# Altium PCB Mach3led.PcbDoc
Units mil, origin at the board's own origin, x right, y up, seen from the top; angles counter-clockwise.
Board outline 1085 x 585 mil, 2 copper layers (Top Layer, Bottom Layer); 7 components, 7 nets, 16 pads, 0 vias.
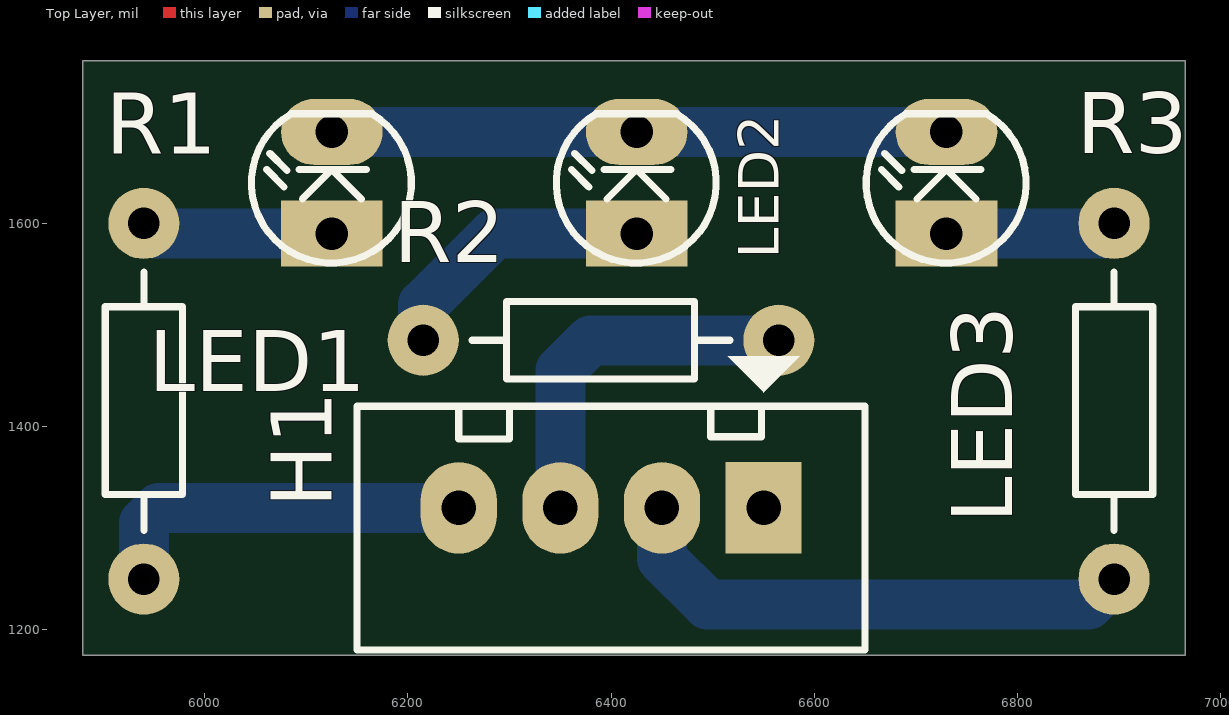
[diagram p0: Top Layer view]
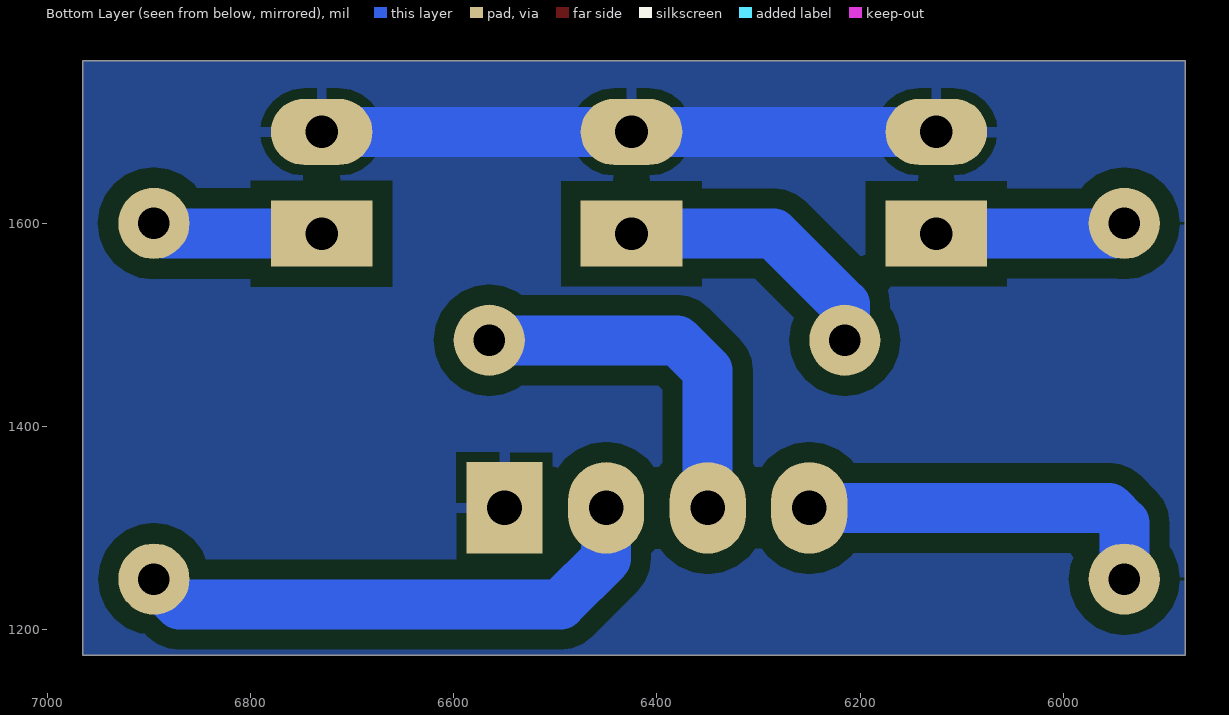
[diagram p1: Bottom Layer view, seen from below]
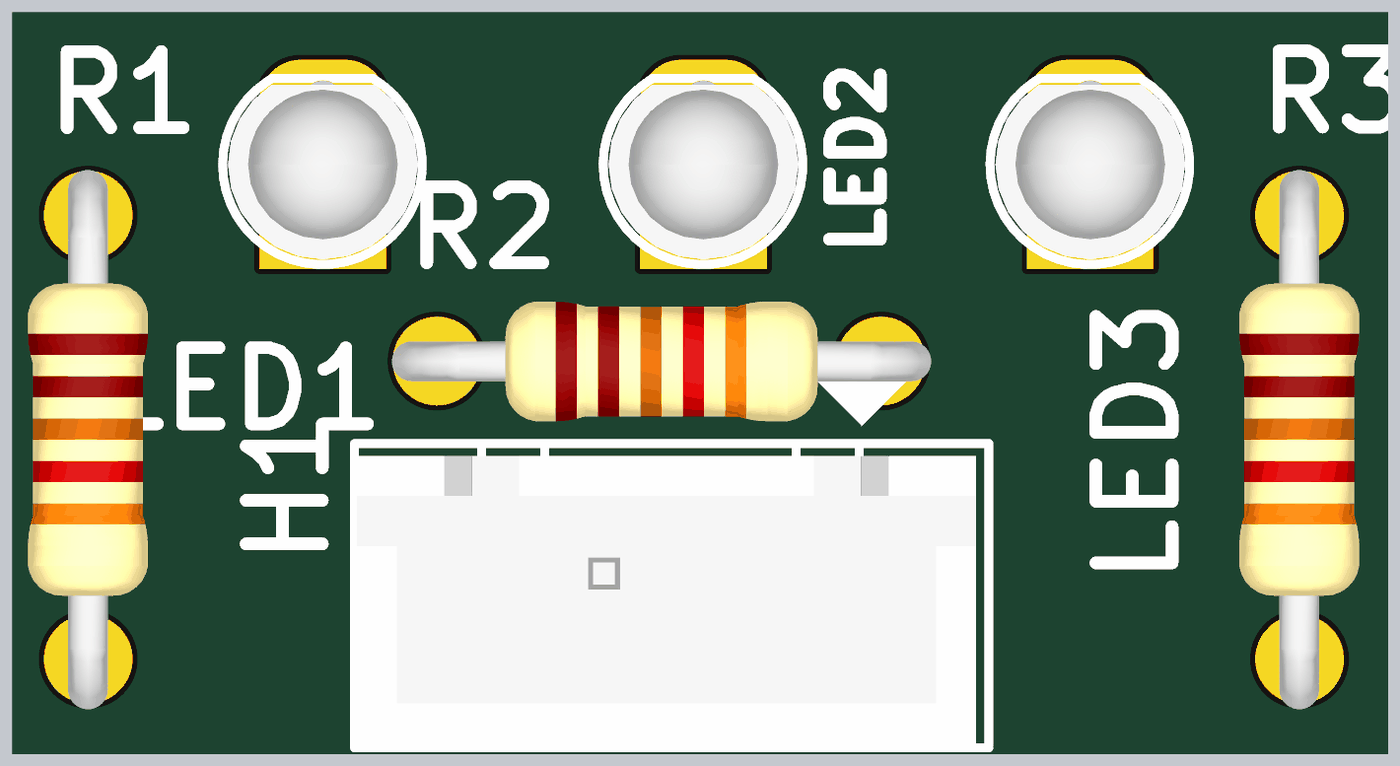
[diagram p2: 3D render of the assembled board from above, using the file's embedded part models]

## Layer stack, top to bottom
Top Solder: solder mask 0.4, Solder Resist, Dk 3.5
Top Layer: signal copper 1.4
Dielectric 1: dielectric 12.6, FR-4, Dk 4.8
Bottom Layer: signal copper 1.4
Bottom Solder: solder mask 0.4, Solder Resist, Dk 3.5

## Board outline
5880,1175 6965,1175 6965,1760 5880,1760

## Design rules (kind name [scope] priority, off if disabled: settings)
Clearance [All] p1: gap=19.68 ignorepadtopadclearanceinfootprint=FALSE
PolygonConnect [All] p1: connectstyle=Relief reliefconductorwidth=10 reliefentries=4 polygonreliefangle="90 Angle" airgapwidth=10
RoomDefinition Mach3led [InComponentClass('Mach3led')] p1: confinementstyle=ConfineIn formatcopy=TRUE lockcomponents=FALSE outline 7045,1060 8200,1060 8200,1680 7045,1680
RoutingVias [All] p1: holewidth=28 width=50 viastyle="Through Hole" minholewidth=28 minwidth=50 maxholewidth=28 maxwidth=50
SolderMaskExpansion [All] p1: expansion=4
Width [All] p1: maxlimit=49.21 minlimit=49.21 preferedwidth=49.21
30 further rules are at their usual default settings.

## Components (designator, comment, footprint, x,y, rotation, side; value= is the part's Value field where it differs from the comment)
H1 "Header4" Header4 6550,1320 r180 top
LED1 "LED" LED-3 6125,1590 r90 top value="LED 3 ly Single Colour"
LED2 "LED" LED-3 6425,1590 r90 top value="LED 3 ly Single Colour"
LED3 "LED" LED-3 6730,1590 r90 top value="LED 3 ly Single Colour"
R1 "1k" R1/4W 5940,1250 r90 top value="R1/4W - 1K"
R2 "1k" R1/4W 6565,1485 r180 top value="R1/4W - 1K"
R3 "1k" R1/4W 6895,1250 r90 top value="R1/4W - 1K"

## Footprints (in the part's own frame and the unit in brackets; to place one, negate y for a bottom-side part, rotate by r counter-clockwise, add the part's x,y. Pads: shape width x height; smd on the part's side, far side on the other; paste and mask are expansions set on the pad)
Header4 [mil] "CON4"
  rect 75x90 hole 34: 1(0,0)
  oval 75x90 hole 34: 2(100,0) 3(200,0) 4(300,0)
  silkscreen extent -100,-150 400,140, body extent -90,-90 398,136, height 276
LED-3 [mil] "LED 2 PIN, 3ly Only colour"
  rect 65x100 hole 32: 1(0,0)
  oval 65x100 hole 32: 2(100,0)
  silkscreen extent -29,-78 118,79, body extent -25,-75 113,75, height 217
R1/4W [mil] "R 1/4W, 2 Pin, 350mil"
  round 70 hole 31: 1(0,0) 2(350,0)
  silkscreen extent 48,-38 302,38, body extent -40,-47 386,47, height 111

## Part data
H1: "Header IDC, 4 x 1 Pin Vertical 2.54mm Pitch (Non-Boxed, Male)"
LED1 LED2 LED3: "LED Single colour Green and Red"
R1 R2 R3: library part R1/4W, "Resistor 1/4W"

## Nets (pads, with @x,y where several pads share a name; then routed paths per layer and width w, separated by ;. In a path a pad name is that pad's centre, name@x,y a point inside that pad or via, vN(x,y) a via of type N, cw(c..) or ccw(c..) an arc to the next point about the centre after c; other vN are vias at no path point)
GND: H1.1 LED1.2 LED2.2 LED3.2 | length 605
  Bottom Layer w49.21: LED1.2 LED2.2 LED3.2
NetH1_2: H1.2 R3.1 | length 524
  Bottom Layer w49.21: H1.2 6450,1270 6495,1225 6870,1225 R3.1
NetH1_3: H1.3 R2.1 | length 362.4
  Bottom Layer w49.21: H1.3 6350,1455 6380,1485 R2.1
NetH1_4: H1.4 R1.1 | length 371.2
  Bottom Layer w49.21: R1.1 5940,1305 5955,1320 H1.4
NetLED1_1: LED1.1 R1.2 | length 189.1
  Bottom Layer w49.21: R1.2 5950,1590 LED1.1
NetLED2_1: LED2.1 R2.2 | length 274
  Bottom Layer w49.21: R2.2 6215,1520 6285,1590 LED2.1
NetLED3_1: LED3.1 R3.2 | length 169.1
  Bottom Layer w49.21: LED3.1 6885,1590 R3.2

## Polygon pours and split planes (outlines as drawn)
GND on Bottom Layer (solid, pour order 2): 5880,1760 5880,1175 6965,1175 6965,1760